# Altium PCB ESP32 Relay Card.PcbDoc
Units mm, origin at the board's own origin, x right, y up, seen from the top; angles counter-clockwise.
Board outline 89 x 129 mm, 2 copper layers (Top Layer, Bottom Layer); 109 components, 87 nets, 327 pads, 42 vias.
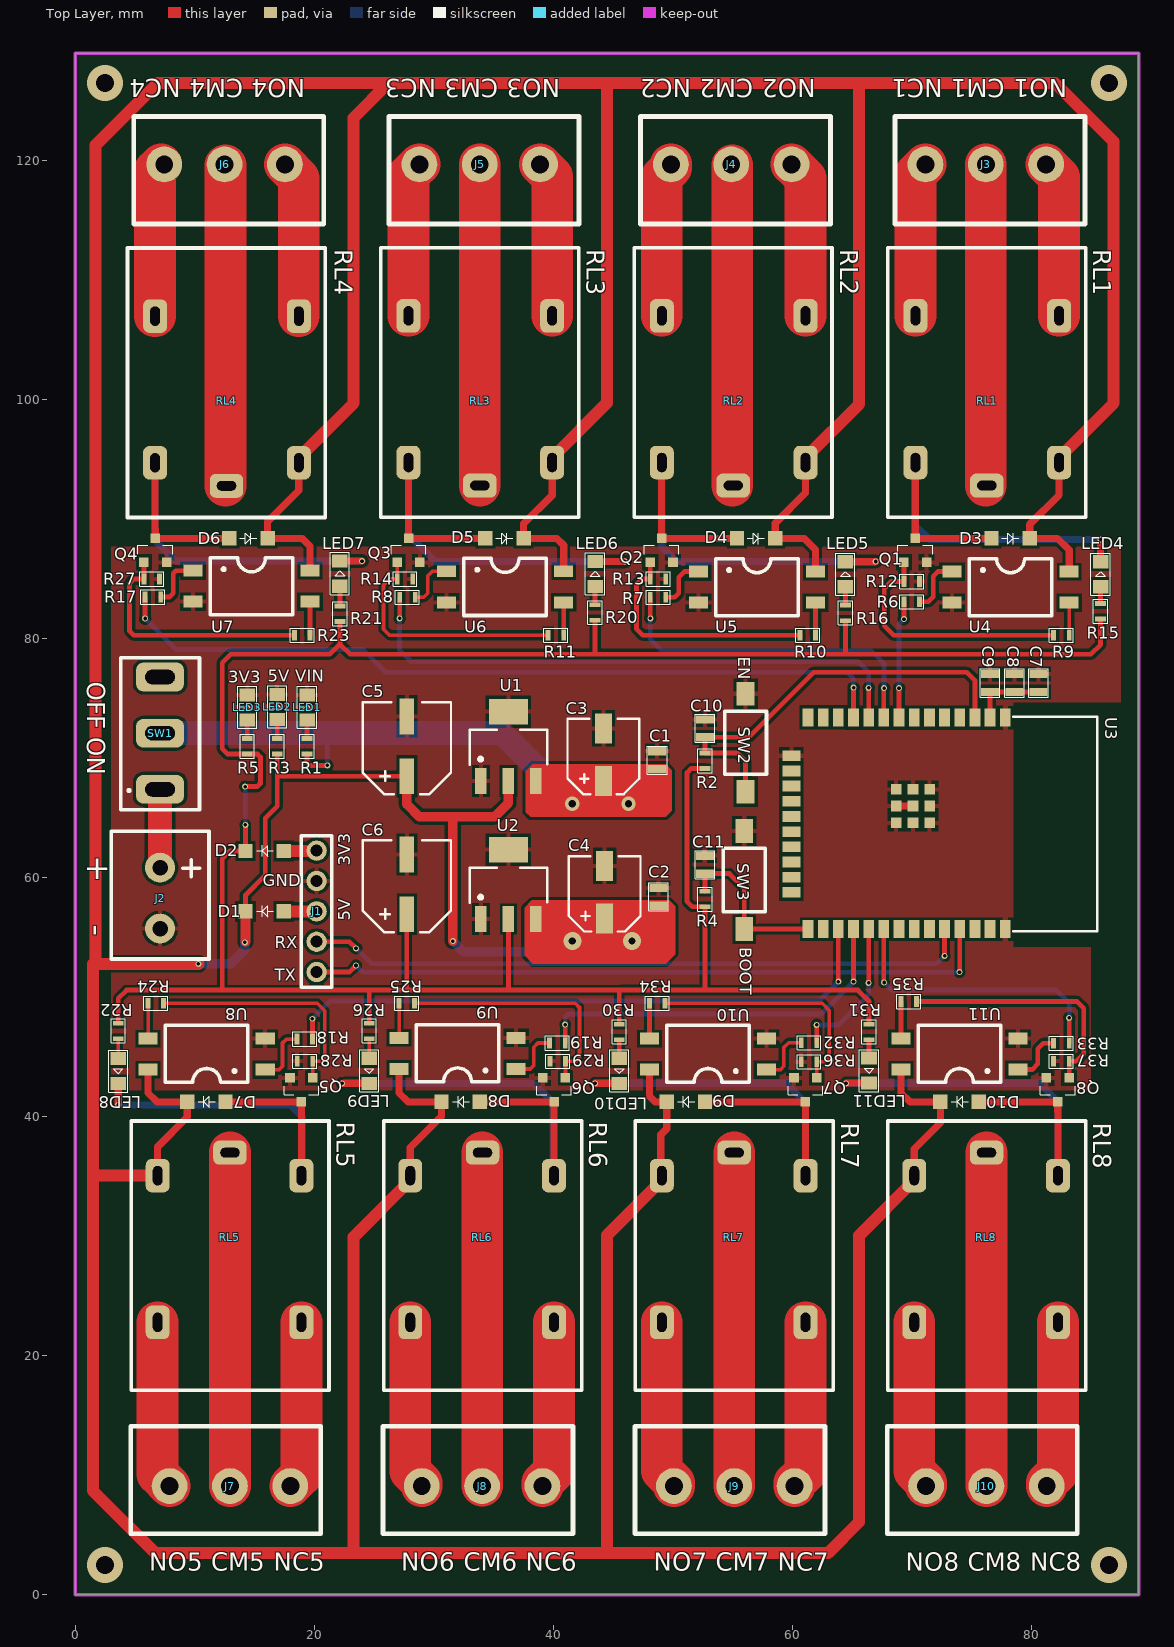
[diagram p0: Top Layer view]
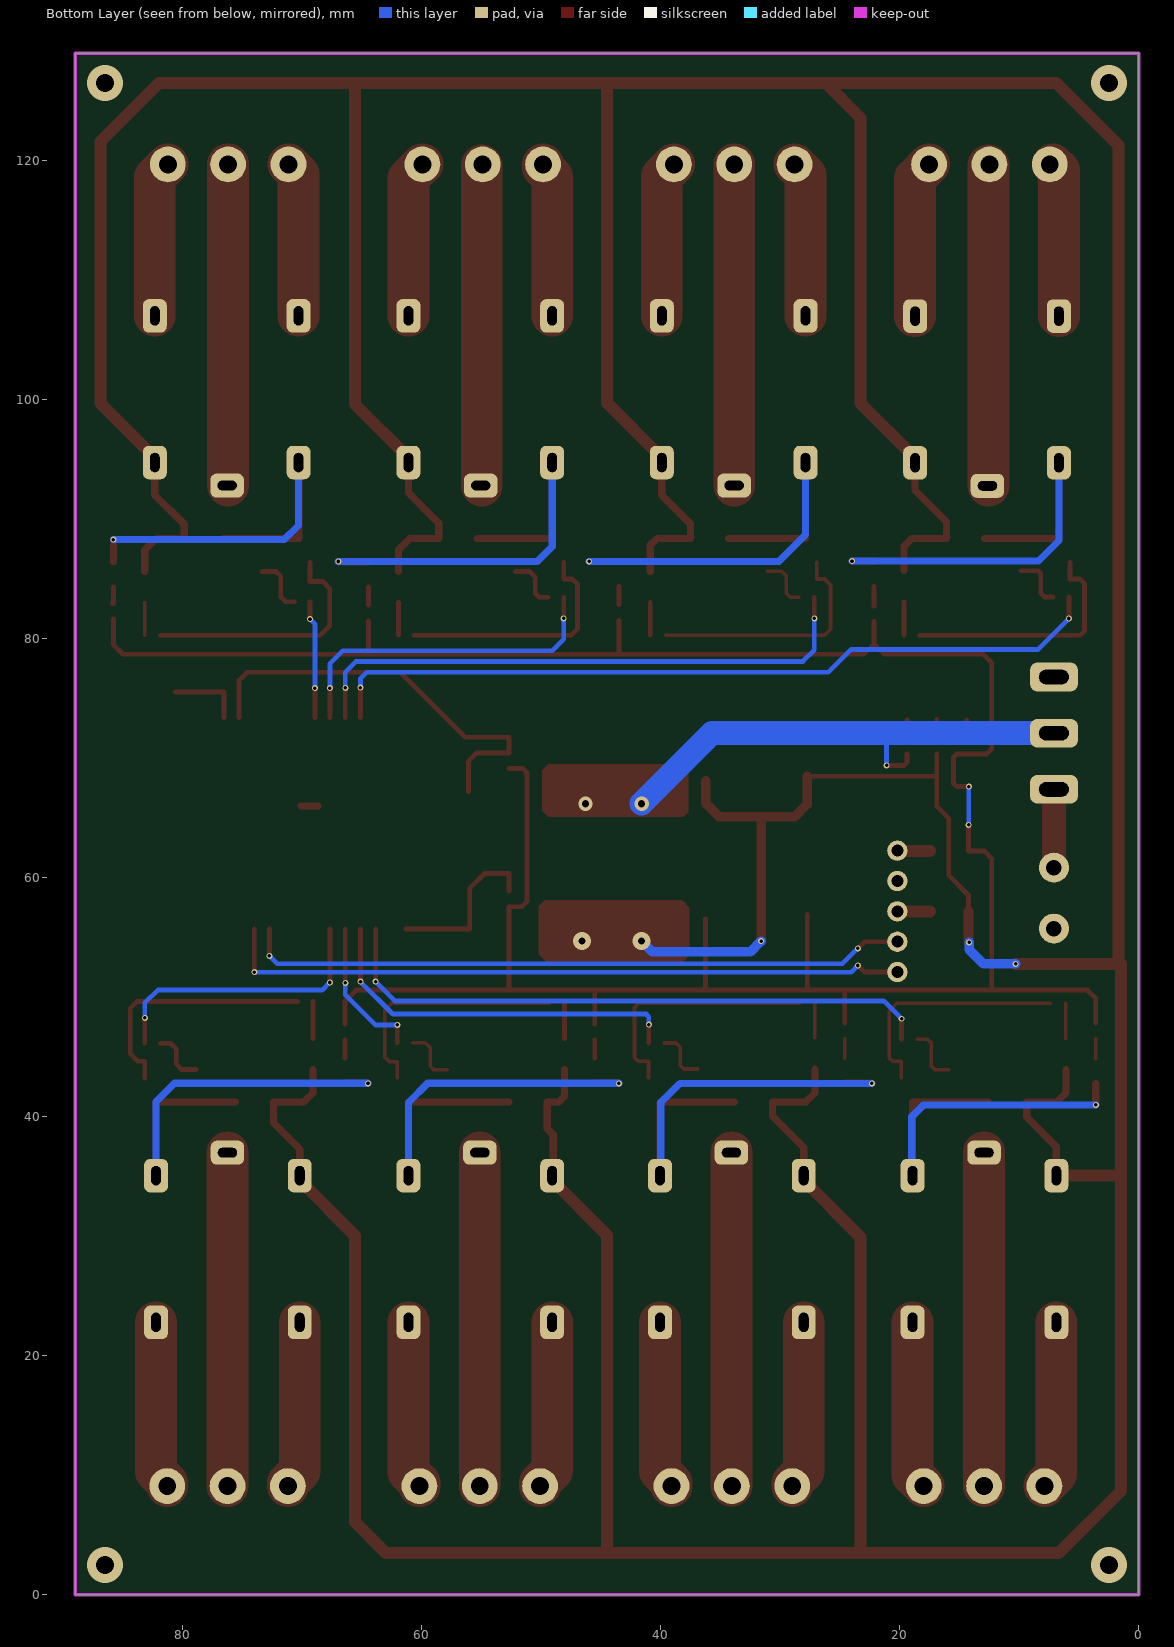
[diagram p1: Bottom Layer view, seen from below]
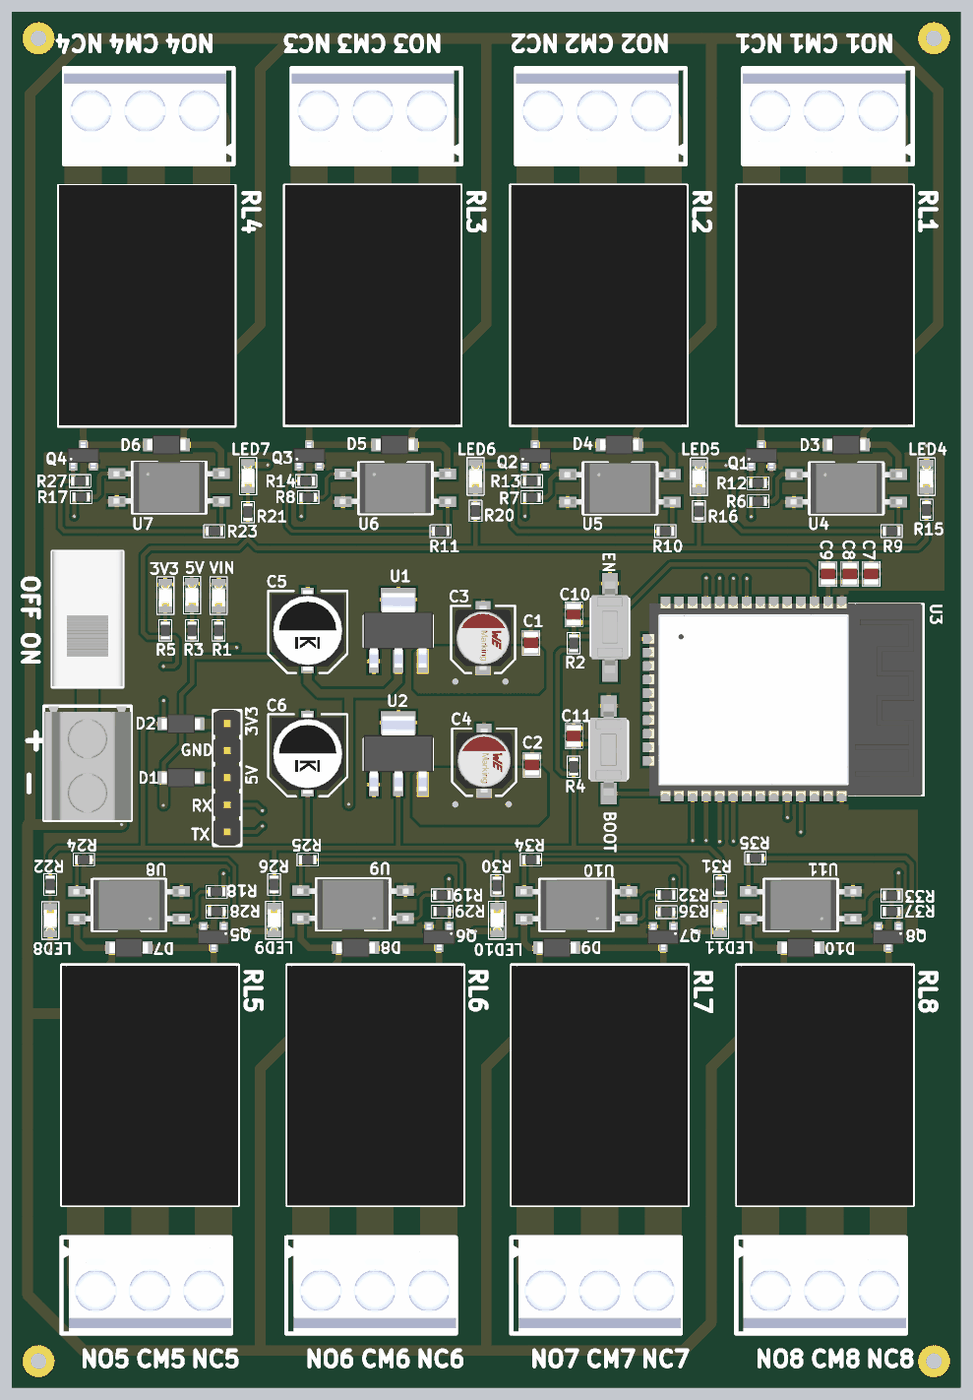
[diagram p2: 3D render of the assembled board from above, using the file's embedded part models]

## Layer stack, top to bottom
Top Solder: solder mask 0.0102, Solder Resist, Dk 3.5
Top Layer: signal copper 0.0356
Dielectric 1: dielectric 0.32, FR-4, Dk 4.8
Bottom Layer: signal copper 0.0356
Bottom Solder: solder mask 0.0102, Solder Resist, Dk 3.5

## Board outline
0,0 0,129 89,129 89,73.7 89,54.4 89,0

## Design rules (kind name [scope] priority, off if disabled: settings)
Clearance [All] p1: gap=0.254 ignorepadtopadclearanceinfootprint=TRUE except(0: Arc-Text Track-Text SMDPad-Text THPad-Text Via-Text Fill-Text Poly-Text Region-Text Text-Text Text-Hole)
ComponentClearance [All] p1: gap=0.127 collisioncheckmode=3 verticalgap=0 showdistances=FALSE
MinimumSolderMaskSliver [All] p1: minsoldermaskwidth=0.127
NetAntennae [All] p1: netantennaetolerance=0.254
PlaneClearance [All] p1: clearance=0.762
PlaneConnect [All] p1: planeconnectstyle=Relief reliefexpansion=0.381 reliefentries=4 reliefconductorwidth=0.381 reliefairgap=0.254
PolygonConnect [All] p1: connectstyle=Relief reliefconductorwidth=0.381 reliefentries=4 polygonreliefangle="90 Angle" airgapwidth=0.254
RoutingCorners [All] p1: cornerstyle=45-Degree minsetback=2.032 maxsetback=2.032
RoutingVias [All] p1: holewidth=0.3 width=0.5 viastyle="Through Hole" minholewidth=0.25 minwidth=0.4 maxholewidth=0.5 maxwidth=1
SMDEntry [All] p1: side=TRUE corner=TRUE anyangle=FALSE
SMDToCorner [All] p1: distance=150000
SMDToPlane [All] p1: distance=150000
SilkToSilkClearance [All] p1: silktosilkclearance=0
SilkToSolderMaskClearance [IsPad] p1: minsilkscreentomaskgap=0.127 clearancetoexposedcopper=TRUE
SolderMaskExpansion [All] p1: expansion=0.05 istentingtop=FALSE
UnRoutedNet [All] p1: checkbadconnections=TRUE
Width [All] p1: maxlimit=100 minlimit=0.2 preferedwidth=1 minimp=50.000000 maximp=50.000000 favimp=50.000000
21 further rules are at their usual default settings.

## Classes and differential pairs
component class "ESP32 Relay Card Relay": D3 D4 D5 D6 D7 D8 D9 D10 J3 J4 J5 J6 J7 J8 J9 J10 LED4 LED5 LED6 LED7 LED8 LED9 LED10 LED11 Q1 Q2 Q3 Q4 Q5 Q6 Q7 Q8 R6 R7 R8 R9 R10 R11 R12 R13 R14 R15 R16 R17 R18 R19 R20 R21 R22 R23 R24 R25 R26 R27 R28 R29 R30 R31 R32 R33 R34 R35 R36 R37 RL1 RL2 RL3 RL4 RL5 RL6 RL7 RL8 U4 U5 U6 U7 U8 U9 U10 U11
component class "ESP32 Relay Card Power": C1 C2 C3 C4 C5 C6 C7 C8 C9 C10 C11 D1 D2 J1 J2 LED1 LED2 LED3 R1 R2 R3 R4 R5 SW1 SW2 SW3 U1 U2 U3

## Components (designator, comment, footprint, x,y, rotation, side; value= is the part's Value field where it differs from the comment)
C1 "CC0805KRX7R9BB104" "CAP 0805" 48.7,69.85 r270 top value=0.1uF
C2 "CC0805KRX7R9BB104" "CAP 0805" 48.8,58.4 r270 top value=0.1uF
C3 "875105359001" "CAP ALUM 10UF" 44.2,70.3 r90 top value=10uF
C4 "875105359001" "CAP ALUM 10UF" 44.3,58.8 r90 top value=10uF
C5 "A766EB226M1DLAE060" "CAP ALUM 22UF" 27.75,71 r90 top value=22uF
C6 "A766EB226M1DLAE060" "CAP ALUM 22UF" 27.75,59.45 r90 top value=22uF
C7 "CC0805KKX7R9BB105" "CAP 0805" 80.611,76.3 r270 top value=1uF
C8 "CC0805KRX7R9BB104" "CAP 0805" 78.6,76.3 r270 top value=0.1uF
C9 "CC0805KKX5R8BB106" "CAP 0805" 76.556,76.3 r270 top value=10uF
C10 "CC0805KRX7R9BB104" "CAP 0805" 52.7,72.5 r270 top value=0.1uF
C11 "CC0805KRX7R9BB104" "CAP 0805" 52.7,61.1 r270 top value=0.1uF
D1 "1N5819W" SOD-123F 15.85,57.19 r180 top
D2 "1N5819W" SOD-123F 15.85,62.247 r180 top
D3 "1N5819W" SOD-123F 78.275,88.4 r0 top
D4 "1N5819W" SOD-123F 56.975,88.4 r0 top
D5 "1N5819W" SOD-123F 35.925,88.4 r0 top
D6 "1N5819W" SOD-123F 14.5,88.4 r0 top
D7 "1N5819W" SOD-123F 10.975,41.25 r180 top
D8 "1N5819W" SOD-123F 32.25,41.25 r180 top
D9 "1N5819W" SOD-123F 51.1,41.25 r180 top
D10 "1N5819W" SOD-123F 74,41.25 r180 top
J1 "61300511121" HEADER 20.2,57.19 r90 top
J2 "TB006-508-02BE" "2POS CONNECTOR" 7.1,58.3 r270 top
J3 "OSTTA034163" "3POS CONNECTOR" 76.2,119.7 r180 top
J4 "OSTTA034163" "3POS CONNECTOR" 54.9,119.7 r180 top
J5 "OSTTA034163" "3POS CONNECTOR" 33.85,119.7 r180 top
J6 "OSTTA034163" "3POS CONNECTOR" 12.5,119.7 r180 top
J7 "OSTTA034163" "3POS CONNECTOR" 12.95,9.1 r0 top
J8 "OSTTA034163" "3POS CONNECTOR" 34.05,9.1 r0 top
J9 "OSTTA034163" "3POS CONNECTOR" 55.15,9.1 r0 top
J10 "OSTTA034163" "3POS CONNECTOR" 76.25,9.1 r0 top
LED1 "150080VS75000" "LED 0805 SMD" 19.4,74.25 r90 top
LED2 "150080VS75000" "LED 0805 SMD" 16.9,74.3 r90 top
LED3 "150080VS75000" "LED 0805 SMD" 14.4,74.25 r90 top
LED4 "150080VS75000" "LED 0805 SMD" 85.8,85.4 r90 top
LED5 "150080VS75000" "LED 0805 SMD" 64.45,85.4 r90 top
LED6 "150080VS75000" "LED 0805 SMD" 43.5,85.425 r90 top
LED7 "150080VS75000" "LED 0805 SMD" 22.15,85.45 r90 top
LED8 "150080VS75000" "LED 0805 SMD" 3.6,43.825 r270 top
LED9 "150080VS75000" "LED 0805 SMD" 24.6,43.85 r270 top
LED10 "150080VS75000" "LED 0805 SMD" 45.525,43.85 r270 top
LED11 "150080VS75000" "LED 0805 SMD" 66.425,43.875 r270 top
Q1 "MMBT3904-7-F" SOT23-3 70.3,87.4 r0 top
Q2 "MMBT3904-7-F" SOT23-3 49.075,87.4 r0 top
Q3 "MMBT3904-7-F" SOT23-3 27.9,87.4 r0 top
Q4 "MMBT3904-7-F" SOT23-3 6.7,87.4 r0 top
Q5 "MMBT3904-7-F" SOT23-3 18.925,42.25 r180 top
Q6 "MMBT3904-7-F" SOT23-3 40.075,42.25 r180 top
Q7 "MMBT3904-7-F" SOT23-3 61.1,42.25 r180 top
Q8 "MMBT3904-7-F" SOT23-3 82.225,42.25 r180 top
R1 "CRGH0603F330R" "RES 0603" 19.4,71 r270 top value=330R
R2 "CRGH0603J10K" "RES 0603" 52.7,69.8 r270 top value=10K
R3 "CRGH0603J100R" "RES 0603" 16.9,71 r270 top value=100R
R4 "CRGH0603J10K" "RES 0603" 52.7,58.219 r270 top value=10K
R5 "CRGH0603J100R" "RES 0603" 14.4,71 r270 top value=100R
R6 "CRGH0603F330R" "RES 0603" 70,83.1 r0 top value=330R
R7 "CRGH0603F330R" "RES 0603" 48.775,83.475 r0 top value=330R
R8 "CRGH0603F330R" "RES 0603" 27.8,83.475 r0 top value=330R
R9 "CRGH0603J1K0" "RES 0603" 82.525,80.3 r180 top value=1K
R10 "CRGH0603J1K0" "RES 0603" 61.3,80.3 r180 top value=1K
R11 "CRGH0603J1K0" "RES 0603" 40.225,80.3 r180 top value=1K
R12 "CRGH0603J10K" "RES 0603" 70,84.8 r180 top value=10K
R13 "CRGH0603J10K" "RES 0603" 48.775,85 r180 top value=10K
R14 "CRGH0603J10K" "RES 0603" 27.6,85 r180 top value=10K
R15 "CRGH0603J100R" "RES 0603" 85.8,82.3 r270 top value=100R
R16 "CRGH0603J100R" "RES 0603" 64.45,82.165 r270 top value=100R
R17 "CRGH0603F330R" "RES 0603" 6.5,83.5 r0 top value=330R
R18 "CRGH0603F330R" "RES 0603" 19.2,46.5 r180 top value=330R
R19 "CRGH0603F330R" "RES 0603" 40.35,46.175 r180 top value=330R
R20 "CRGH0603J100R" "RES 0603" 43.5,82.2 r270 top value=100R
R21 "CRGH0603J100R" "RES 0603" 22.15,82.086 r270 top value=100R
R22 "CRGH0603J100R" "RES 0603" 3.6,47.185 r90 top value=100R
R23 "CRGH0603J1K0" "RES 0603" 19,80.3 r180 top value=1K
R24 "CRGH0603J1K0" "RES 0603" 6.75,49.5 r0 top value=1K
R25 "CRGH0603J1K0" "RES 0603" 27.75,49.5 r0 top value=1K
R26 "CRGH0603J100R" "RES 0603" 24.6,47.185 r90 top value=100R
R27 "CRGH0603J10K" "RES 0603" 6.4,85 r180 top value=10K
R28 "CRGH0603J10K" "RES 0603" 19.225,44.65 r0 top value=10K
R29 "CRGH0603J10K" "RES 0603" 40.375,44.65 r0 top value=10K
R30 "CRGH0603J100R" "RES 0603" 45.525,47.1 r90 top value=100R
R31 "CRGH0603J100R" "RES 0603" 66.425,47.1 r90 top value=100R
R32 "CRGH0603F330R" "RES 0603" 61.4,46.2 r180 top value=330R
R33 "CRGH0603F330R" "RES 0603" 82.525,46.15 r180 top value=330R
R34 "CRGH0603J1K0" "RES 0603" 48.7,49.5 r0 top value=1K
R35 "CRGH0603J1K0" "RES 0603" 69.75,49.65 r0 top value=1K
R36 "CRGH0603J10K" "RES 0603" 61.4,44.6 r0 top value=10K
R37 "CRGH0603J10K" "RES 0603" 82.525,44.65 r0 top value=10K
RL1 "G5LE-1 DC5" RELAY 76.323,99.923 r90 top
RL2 "G5LE-1 DC5" RELAY 55.1,99.923 r90 top
RL3 "G5LE-1 DC5" RELAY 33.9,99.923 r90 top
RL4 "G5LE-1 DC5" RELAY 12.7,99.9 r90 top
RL5 "G5LE-1 DC5" RELAY 12.912,29.9 r270 top
RL6 "G5LE-1 DC5" RELAY 34.05,29.9 r270 top
RL7 "G5LE-1 DC5" RELAY 55.1,29.9 r270 top
RL8 "G5LE-1 DC5" RELAY 76.224,29.9 r270 top
SW1 "500SSP1S2M2QEA" "TACTICLE SWITCH TH" 7.1,72.1 r90 top
SW2 "PTS636SM43SMTR LFS" "TACTICLE SWITCH" 56.1,71.3 r270 top
SW3 "PTS636SM43SMTR LFS" "TACTICLE SWITCH" 55.984,59.809 r270 top
U1 "AMS1117-5.0" SOT223 36.25,71 r0 top
U2 "AMS1117-3.3" SOT223 36.25,59.45 r0 top
U3 "ESP32-WROOM-32E-H4" ESP32 68.876,64.561 r270 top value=ESP32-WROOM
U4 "APC-817B1-SL" OPTOISOLATOR 78.275,84.325 r0 top
U5 "APC-817B1-SL" OPTOISOLATOR 57.05,84.325 r0 top
U6 "APC-817B1-SL" OPTOISOLATOR 35.975,84.35 r0 top
U7 "APC-817B1-SL" OPTOISOLATOR 14.75,84.4 r0 top
U8 "APC-817B1-SL" OPTOISOLATOR 11,45.25 r180 top
U9 "APC-817B1-SL" OPTOISOLATOR 32,45.3 r180 top
U10 "APC-817B1-SL" OPTOISOLATOR 52.95,45.25 r180 top
U11 "APC-817B1-SL" OPTOISOLATOR 74,45.25 r180 top

## Footprints (in the part's own frame and the unit in brackets; to place one, negate y for a bottom-side part, rotate by r counter-clockwise, add the part's x,y. Pads: shape width x height; smd on the part's side, far side on the other; paste and mask are expansions set on the pad)
"2POS CONNECTOR" [mm]
  round 2.5 hole 1.3 mask+0.05: 1(-2.55,0) 2(2.55,0)
  silkscreen extent -5.6,-4.1 5.1,4.1, body extent -5.58,-4.1 5.08,4.1, height 10
"3POS CONNECTOR" [mm]
  round 3 hole 1.5 mask+0.05: 1(-5.05,0) 2(0,0) 3(5.05,0)
  silkscreen extent -8.3,-4 7.6,5, body extent -8.32,-4 7.62,5, height 13
"CAP 0805" [mm]
  rect 0.7x1.5 smd mask+0.05: 1(-0.75,0) 2(0.75,0)
  silkscreen extent -1.17,-0.82 1.17,0.82, body extent -1,-0.67 1,0.67, height 1.22
"CAP ALUM 10UF" [mm]
  rect 2.5x1.4 smd mask+0.05: 1(-2.2,0) 2(2.2,0)
  silkscreen extent -3.3,-3 3,3, body extent -3,-2.65 3,2.65, height 5.8
"CAP ALUM 22UF" [mm]
  rect 3x1.2 smd mask+0.05: 1(-2.5,0) 2(2.5,0)
  silkscreen extent -4,-3.7 3.7,3.7, body extent -3.75,-3.4 3.75,3.4, height 6
ESP32 [mm]
  rect 1.5x0.9 smd mask+0.05: 1(-8.834,8.951) 2(-8.834,7.681) 3(-8.834,6.411) 4(-8.834,5.141) 5(-8.834,3.871) 6(-8.834,2.601) 7(-8.834,1.331) 8(-8.834,0.061) 9(-8.834,-1.209) 10(-8.834,-2.479) 11(-8.834,-3.749) 12(-8.859,-5.019) 13(-8.859,-6.289) 14(-8.859,-7.559) 25(8.859,-7.559) 26(8.859,-6.289) 27(8.859,-5.019) 28(8.859,-3.749) 29(8.859,-2.479) 30(8.859,-1.209) 31(8.859,0.061) 32(8.859,1.331) 33(8.859,2.601) 34(8.859,3.871) 35(8.859,5.141) 36(8.859,6.411) 37(8.859,7.681) 38(8.859,8.951)
  rect 0.9x1.5 smd mask+0.05: 15(-5.649,-8.951) 16(-4.379,-8.951) 17(-3.109,-8.951) 18(-1.839,-8.951) 19(-0.569,-8.951) 20(0.701,-8.951) 21(1.971,-8.951) 22(3.241,-8.951) 23(4.511,-8.951) 24(5.781,-8.951)
  rect 0.9x0.9 smd mask+0.05: ""(-2.839,1.224) ""(-2.839,2.624) ""(-2.839,-0.176) ""(-1.439,2.624) ""(-1.439,1.224) ""(-1.439,-0.176) ""(-0.039,2.624) ""(-0.039,1.224) ""(-0.039,-0.176)
  silkscreen extent -8.93,9.62 9.05,16.65, body extent -8.94,-9.06 9.06,16.44, height 3.25
HEADER [mm]
  round 1.7 hole 1 mask+0.05: 1(-5.08,0) 2(-2.54,0) 3(0,0) 4(2.54,0) 5(5.08,0)
  silkscreen extent -6.35,-1.28 6.32,1.28, body extent -6.35,-1.27 6.35,1.27, height 8.47
"LED 0805 SMD" [mm]
  rect 1.1x1.3 smd mask+0.05: 1(-1.05,0) 2(1.05,0)
  silkscreen extent -1.75,-0.8 1.78,0.8, body extent -1,-0.63 1,0.63, height 0.7
OPTOISOLATOR [mm]
  rect 1.6x1 smd mask+0.05: 1(-4.9,1.3) 2(-4.9,-1.3) 3(4.9,-1.3) 4(4.9,1.3)
  silkscreen extent -3.45,-2.4 3.45,2.37, body extent -5.22,-2.39 5.22,2.39, height 3.81
RELAY [mm]
  rrect50% 2x2.8 hole 0.8 slot 1.6 at 90 deg mask+0.05: 1(-7.1,0.038)
  rrect50% 2.8x2 hole 0.8 slot 1.6 at 0 deg mask+0.05: 2(-5.175,-6.013) 3(7.1,-6.013) 4(7.1,6.013) 5(-5.175,6.013)
  silkscreen extent -9.75,-8.23 12.8,8.32, body extent -9.67,-8.21 12.83,8.29, height 19
"RES 0603" [mm]
  rect 0.4x0.9 smd mask+0.05: 1(-0.65,0) 2(0.65,0)
  silkscreen extent -1,-0.6 1,0.6, body extent -0.8,-0.4 0.8,0.4, height 0.55
SOD-123F [mm]
  rect 1.2x1.2 smd mask+0.05: 1(-1.6,0) 2(1.6,0)
  silkscreen extent -0.72,-0.48 0.67,0.45, body extent -1.8,-0.9 1.8,0.9, height 1.1
SOT23-3 [mm]
  rect 0.8x0.8 smd mask+0.05: 1(-0.95,-1) 2(0.95,-1) 3(0,1)
  silkscreen extent -1.45,-0.33 1.45,0.43, body extent -1.5,-1.21 1.5,1.21, height 1.12
SOT223 [mm]
  rect 0.95x2.15 smd mask+0.102: 1(-2.3,-2.9) 2(0,-2.9) 3(2.3,-2.9)
  rect 3.25x2.15 smd mask+0.102: 1(0,2.9)
  silkscreen extent -3.25,-1.55 3.25,1.38, body extent -3.25,-3.5 3.25,3.5, height 1.8
"TACTICLE SWITCH" [mm]
  rect 2x1.5 smd mask+0.05: 1(-4.1,0) 2(4.1,0)
  silkscreen extent -2.65,-1.75 2.65,1.75, body extent -4.3,-1.75 4.3,1.75, height 4.3
"TACTICLE SWITCH TH" [mm]
  rrect50% 2.4x4 hole 1.2 slot 2.5 at 90 deg mask+0.05: 1(-4.7,0) 2(0,0) 3(4.7,0)
  silkscreen extent -6.4,-3.3 6.3,3.3, body extent -6.35,-3.3 6.35,3.3, height 13.59

## Part data
C1 C2 C8 C10 C11: library part "CAP CER 0.1UF 0805 SMD", "CAP CER 0.1UF 50V X7R 0805"
C3 C4: library part "CAP ALUM 10UF SMD", "CAP ALUM 10UF 20% 16V SMD"
C5 C6: library part "CAP ALUM 22UF SMD", "CAP ALUM 22UF 20% 20V SMD"
C7: library part "CAP CER 1UF 0805 SMD", "CAP CER 1UF 50V X7R 0805"
C9: library part "CAP CER 10UF 0805 SMD", "CAP CER 10UF 25V X5R 0805"
D1 D2 D3 D4 D5 D6 D7 D8 D9 D10: library part "SCHOTTKY DIODE SMD", "DIODE SCHOTTKY 40V 1A SOD-123F"
J1: library part "HEADER 5POS TH", "CONN HEADER 5POS 2.54MM"
J2: library part "2POS CONNECTOR", "TERM BLK 2P 5.08 PCB"
J3 J4 J5 J6 J7 J8 J9 J10: library part "3POS CONNECTOR", "TERM BLK 3P 5.08MM PCB"
LED1 LED2 LED3 LED4 LED5 LED6 LED7 LED8 LED9 LED10 LED11: library part "GREEN LED 0805 SMD", "LED GREEN 0805 SMD"
Q1 Q2 Q3 Q4 Q5 Q6 Q7 Q8: library part "NPN TRANSISTOR SMD", "TRANS NPN 40V 0.2A SOT23-3"
R1 R6 R7 R8 R17 R18 R19 R32 R33: library part "RES 330 OHM 0603 SMD", "RES 330 OHM 1% 1/5W 0603"
R2 R4 R12 R13 R14 R27 R28 R29 R36 R37: library part "RES 10K OHM 0603 SMD", "RES 10K OHM 5% 1/5W 0603"
R3 R5 R15 R16 R20 R21 R22 R26 R30 R31: library part "RES 100 OHM 0603 SMD", "RES 100 OHM 5% 1/5W 0603"
R9 R10 R11 R23 R24 R25 R34 R35: library part "RES 1K OHM 0603 SMD", "RES 1K OHM 5% 1/5W 0603"
RL1 RL2 RL3 RL4 RL5 RL6 RL7 RL8: library part "RELAY TH", "RELAY 5VDC COIL 10A"
SW1: library part "SLIDE SWITCH TH", "SWITCH SLIDE 5A 120V"
SW2 SW3: library part "TACTILE SWITCH SMD", "SWITCH TACTILE 0.05A 12V"
U1: library part "LDO REG 5V 1A SMD", "IC LDO REG 5V 1A SOT223"
U2: library part "LDO REG 3V3 1A SMD", "IC LDO REG 3.3V 1A SOT223"
U3: library part ESP32-WROOM-32E, "RF TXRX MOD BT WIFI TH SMD"
U4 U5 U6 U7 U8 U9 U10 U11: library part "OPTOCOUPLER SMD", "OPTOISOLATOR 5KV 1CH SMD"

## Via types
v1: diameter 0.5, hole 0.3, Top Layer to Bottom Layer, tented both sides, 34 vias
v2: diameter 3, hole 1.5, Top Layer to Bottom Layer, 4 vias
v3: diameter 1.5, hole 0.6, Top Layer to Bottom Layer, tented both sides, 2 vias
v4: diameter 1.2, hole 0.6, Top Layer to Bottom Layer, tented both sides, 2 vias

## Nets (pads, with @x,y where several pads share a name; then routed paths per layer and width w, separated by ;. In a path a pad name is that pad's centre, name@x,y a point inside that pad or via, vN(x,y) a via of type N, cw(c..) or ccw(c..) an arc to the next point about the centre after c; other vN are vias at no path point)
3V3: C6.1 D2.2 R2.2 R4.2 R5.2 R15.2 R16.2 R20.2 R21.2 R22.2 R26.2 R30.2 R31.2 U2.2 | length 224
  Top Layer w0.4: R22.2 3.6,49.9 4.3,50.6 12.2,50.6 ; v1(14.224,67.632) 15.232,67.632 15.5,67.9 15.5,70.1 15.25,70.35 12.75,70.35 12.3,70.8 12.3,78 13,78.7 21.3,78.7 22.15,79.55 ; v1@14.25,64.41 D2.2 12.947,62.247 12.3,61.6 12.3,50.7 12.2,50.6 ; R21.2 22.15,79.55 ; R26.2 24.6,50.6 ; C6.1 27.75,50.6 ; U2.2 36.25,50.65 36.2,50.6 ; R20.2 43.5,78.7 ; R30.2 45.525,50.525 45.6,50.6 ; R2.2 51.55,69.15 51.2,68.8 51.2,58 51.631,57.569 R4.2 52.7,56.988 52.7,50.6 ; R16.2 64.45,78.75 64.5,78.7 ; R31.2 66.425,49.675 65.5,50.6 52.7,50.6 ; R15.2 85.8,79.5 85,78.7 64.5,78.7 ; 12.2,50.6 24.6,50.6 ; 22.15,79.55 23,78.7 43.5,78.7 ; 24.6,50.6 27.75,50.6 ; 27.75,50.6 36.2,50.6 ; 36.2,50.6 45.6,50.6 ; 43.5,78.7 64.5,78.7 ; 45.6,50.6 52.7,50.6
  Bottom Layer w0.4: v1(14.224,67.632) 14.237,67.618 v1(14.237,64.423)
5V: C2.2 C4.1 C5.1 D1.2 D3.2 D4.2 D5.2 D6.2 D7.2 D8.2 D9.2 D10.2 R3.2 RL1.2 RL2.2 RL3.2 RL4.2 RL5.2 RL6.2 RL7.2 RL8.2 U1.2 U2.3 U4.4 U5.4 U6.4 U7.4 U8.4 U9.4 U10.4 U11.4 | length 680.9
  Top Layer w0.4: D1.2 14.25,58.55 15.9,60.2 15.9,65 16.9,66 16.9,68.5 ; R3.2 16.9,68.5 ; C5.1 16.9,68.5
  Top Layer w0.6: U8.4 6.1,42 6.85,41.25 D7.2 9.375,39.975 6.9,37.5 RL5.2 ; RL4.2 18.713,92.413 16.1,89.8 D6.2 19,88.4 19.65,87.75 U7.4 ; U9.4 27.1,42 27.85,41.25 D8.2 30.65,40.05 28.038,37.437 RL6.2 ; RL3.2 39.913,92.013 37.525,89.625 D5.2 40.3,88.4 40.875,87.825 U6.4 ; U10.4 48.05,41.719 48.519,41.25 D9.2 49.5,39 49,38.5 49,35.162 RL7.2 ; RL2.2 61.112,92.213 58.575,89.675 D4.2 61,88.4 61.95,87.45 U5.4 ; U11.4 69.1,42 69.85,41.25 D10.2 72.4,39.5 70.211,37.311 RL8.2 ; RL1.2 82.336,92.036 79.875,89.575 D3.2 82.2,88.4 83.175,87.425 U4.4
  Top Layer w0.8: v1@14.25,54.65 D1.2 ; C5.1 27.75,66.15 28.8,65.1 31.6,65.1 ; v1(31.6,54.7) 31.6,65.1 ; U1.2 36.25,66.25 35.1,65.1 31.6,65.1
  Top Layer w1: 1.7,52.8 1.7,121.3 6.906,126.506 26.206,126.506 ; RL5.2 1.48,35.075 ; v1(10.3,52.8) 1.48,52.8 1.48,35.075 ; RL4.2 18.713,95.125 23.3,99.712 23.3,123.6 26.206,126.506 ; RL6.2 28.038,34.675 23.3,29.937 23.3,3.5 ; RL3.2 39.913,95.148 44.5,99.735 44.5,126.4 44.394,126.506 ; RL7.2 49.087,34.675 44.5,30.087 44.5,3.5 ; RL2.2 61.112,95.148 65.6,99.636 65.6,126.3 65.806,126.506 ; RL8.2 70.211,34.675 65.6,30.064 65.6,6.1 63,3.5 44.5,3.5 ; RL1.2 82.336,95.148 86.9,99.712 86.9,121.6 82,126.5 68.3,126.5 68.294,126.506 65.806,126.506 ; 1.48,35.075 1.48,8.72 6.7,3.5 23.3,3.5 ; 23.3,3.5 44.5,3.5 ; 26.206,126.506 44.394,126.506 ; 44.394,126.506 65.806,126.506
  Bottom Layer w0.8: v1(10.3,52.8) 13,52.8 14.2,54 v1(14.2,54.6) ; v1(31.6,54.7) 32.5,53.8 40.7,53.8 v3(41.6,54.7)
  other v3: 46.6,54.7
COM1: J3.2 RL1.1 | length 27
  Top Layer w2: RL1.1@76.2,92.823 RL1.1
  Top Layer w3.5: RL1.1@76.2,92.823 J3.2
COM2: J4.2 RL2.1 | length 27
  Top Layer w2: J4.2 J4.2@54.981,119.619 ; RL2.1@54.981,92.823 RL2.1
  Top Layer w3.5: RL2.1@54.981,92.823 J4.2@54.981,119.619
COM3: J5.2 RL3.1 | length 26.9
  Top Layer w2: J5.2 J5.2@33.856,119.694 ; RL3.1@33.856,92.823 RL3.1
  Top Layer w3.5: RL3.1@33.856,92.823 J5.2@33.856,119.694
COM4: J6.2 RL4.1 | length 27
  Top Layer w2: J6.2 J6.2@12.581,119.619 ; RL4.1@12.581,92.8 RL4.1
  Top Layer w3.5: RL4.1@12.581,92.8 J6.2@12.581,119.619
COM5: J7.2 RL5.1 | length 27.9
  Top Layer w3.5: J7.2 RL5.1
COM6: J8.2 RL6.1 | length 27.9
  Top Layer w2: J8.2 J8.2@34.069,9.119 ; RL6.1@34.069,37 RL6.1
  Top Layer w3.5: J8.2@34.069,9.119 RL6.1@34.069,37
COM7: J9.2 RL7.1 | length 27.9
  Top Layer w2: RL7.1 RL7.1@55.144,37 ; J9.2@55.144,9.106 J9.2
  Top Layer w3.5: J9.2@55.144,9.106 RL7.1@55.144,37
COM8: J10.2 RL8.1 | length 27.9
  Top Layer w2: J10.2 J10.2@76.261,9.111
  Top Layer w3.5: J10.2@76.261,9.111 RL8.1
EN: C10.2 R2.1 SW2.2 U3.3 | length 35.8
  Top Layer w0.4: SW2.2 56.1,69.75 55.4,70.45 R2.1 C10.2 56.35,71.75 61.8,77.2 74.6,77.2 75.287,76.513 U3.3
GND: C1.1 C2.1 C3.2 C4.2 C5.2 C6.2 C7.1 C8.1 C9.1 C10.1 C11.1 J1.4 J2.2 LED1.2 LED2.2 LED3.2 Q1.2 Q2.2 Q3.2 Q4.2 Q5.2 Q6.2 Q7.2 Q8.2 R12.1 R13.1 R14.1 R27.1 R28.1 R29.1 R36.1 R37.1 SW2.1 SW3.1 U1.1 U2.1 U3. U3.1 U3.15 U3.38 U4.2 U5.2 U6.2 U7.2 U8.2 U9.2 U10.2 U11.2 | length 1.4
  Top Layer w0.6: U3.@68.7,66 U3.@70.1,66
IO0: C11.2 R4.1 SW3.2 U3.25 | length 14
  Top Layer w0.4: R4.1 52.7,59.619 C11.2 54.75,60.35 55.984,59.116 SW3.2 57.115,55.709 57.122,55.702 U3.25
L1: D3.1 LED4.2 Q1.3 RL1.5 | length 35.8
  Top Layer w0.6: RL1.5 70.3,94.737 Q1.3 D3.1 ; LED4.2 v1(85.8,88.3)
  Bottom Layer w0.6: RL1.5 70.31,89.49 71.5,88.3 v1(85.8,88.3)
L2: D4.1 LED5.2 Q2.3 RL2.5 | length 40.6
  Top Layer w0.6: RL2.5 49.075,94.736 Q2.3 D4.1 ; LED5.2 66.97,86.45 v1(66.983,86.462)
  Bottom Layer w0.6: RL2.5 49.087,87.713 50.338,86.462 v1(66.983,86.462)
L3: D5.1 LED6.2 Q3.3 RL3.5 | length 40.3
  Top Layer w0.6: RL3.5 27.887,89.194 27.9,89.181 Q3.3 D5.1 ; LED6.2 v1(45.997,86.474) v1(45.997,86.474)
  Bottom Layer w0.6: RL3.5 27.887,88.713 30.126,86.474 v1(45.997,86.474)
L4: D6.1 LED7.2 Q4.3 RL4.5 | length 38.9
  Top Layer w0.6: RL4.5 6.687,89.194 6.7,89.181 Q4.3 D6.1 ; LED7.2 v1(24,86.5)
  Bottom Layer w0.6: RL4.5 6.687,88.213 8.4,86.5 v1(24,86.5)
L5: D7.1 LED8.2 Q5.3 RL5.5 | length 35.1
  Top Layer w0.6: v1@3.6,41 3.6,41.844 LED8.2 ; D7.1 13.556,41.25 Q5.3 18.925,40.469 RL5.5
  Bottom Layer w0.6: v1(3.6,41) 18,41 19,40 19,35.15 RL5.5
L6: D8.1 LED9.2 Q6.3 RL6.5 | length 39.2
  Top Layer w0.6: v1(22.331,42.797) 22.505,42.797 22.509,42.8 LED9.2 ; D8.1 39.294,41.25 Q6.3 40.075,35.087 RL6.5
  Bottom Layer w0.6: v1(22.331,42.797) 38.403,42.797 40,41.2 40,35.138 RL6.5
L7: D9.1 LED10.2 Q7.3 RL7.5 | length 41
  Top Layer w0.6: v1(43.5,42.8) LED10.2 ; D9.1 Q7.3 61.1,40.469 61.113,40.456 RL7.5
  Bottom Layer w0.6: v1(43.5,42.8) 59.5,42.8 61.1,41.2 61.1,35.088 RL7.5
L8: D10.1 LED11.2 Q8.3 RL8.5 | length 39.3
  Top Layer w0.6: v1(64.5,42.8) 64.525,42.825 LED11.2 ; D10.1 Q8.3 82.225,40.469 82.237,40.457 RL8.5
  Bottom Layer w0.6: v1(64.5,42.8) 80.7,42.8 82.237,41.263 RL8.5
NC1: J3.3 RL1.4 | length 13
  Top Layer w3.5: RL1.4 70.311,118.861 J3.3
NC2: J4.3 RL2.4 | length 13
  Top Layer w3.5: RL2.4 49.087,118.667 49.85,119.429 J4.3
NC3: J5.3 RL3.4 | length 13.1
  Top Layer w3.5: RL3.4 27.888,118.787 J5.3
NC4: J6.3 RL4.4 | length 12.9
  Top Layer w3.5: RL4.4 6.688,119.188 J6.3@7.2,119.7
NC5: J7.3 RL5.4 | length 14.1
  Top Layer w3.5: J7.3 18.925,10.025 RL5.4
NC6: J8.3 RL6.4 | length 14.1
  Top Layer w3.5: J8.3 39.1,9.371 40.063,10.333 RL6.4
NC7: J9.3 RL7.4 | length 14.1
  Top Layer w3.5: J9.3 60.2,9.371 61.112,10.283 RL7.4
NC8: J10.3 RL8.4 | length 14.1
  Top Layer w3.5: J10.3 81.3,9.371 82.236,10.307 RL8.4
NetC7_2: C7.2 C8.2 C9.2 U3.2 | length 6.2
  Top Layer w0.4: U3.2 76.557,74.817 76.556,74.819 C9.2 C8.2 C7.2
NetD1_1: D1.1 J1.3 | length 2.8
  Top Layer w1: D1.1 J1.3
NetD2_1: D2.1 J1.5 | length 2.8
  Top Layer w1: D2.1 20.177,62.247 J1.5
NetLED1_1: LED1.1 R1.1 | length 1.5
  Top Layer w0.4: R1.1 LED1.1
NetLED2_1: LED2.1 R3.1 | length 1.6
  Top Layer w0.4: R3.1 LED2.1
NetLED3_1: LED3.1 R5.1 | length 1.5
  Top Layer w0.4: R5.1 LED3.1
NetLED4_1: LED4.1 R15.1 | length 1.5
  Top Layer w0.3: R15.1 R15.1@85.95,82.95
  Top Layer w0.4: R15.1 LED4.1
NetLED5_1: LED5.1 R16.1 | length 1.5
  Top Layer w0.4: R16.1 64.45,83.396 LED5.1
NetLED6_1: LED6.1 R20.1 | length 1.5
  Top Layer w0.4: R20.1 LED6.1
NetLED7_1: LED7.1 R21.1 | length 1.7
  Top Layer w0.4: R21.1 22.15,83.317 LED7.1
NetLED8_1: LED8.1 R22.1 | length 1.7
  Top Layer w0.3: LED8.1 R22.1
NetLED9_1: LED9.1 R26.1 | length 1.6
  Top Layer w0.3: LED9.1 24.6,45.954 R26.1
NetLED10_1: LED10.1 R30.1 | length 1.6
  Top Layer w0.4: LED10.1 R30.1
NetLED11_1: LED11.1 R31.1 | length 1.5
  Top Layer w0.4: LED11.1 R31.1
NetQ1_1: Q1.1 R9.2 R12.2 | length 21.1
  Top Layer w0.4: Q1.1 R12.2 68.3,84.8 67.7,84.2 67.7,81.1 68.5,80.3 R9.2
NetQ2_1: Q2.1 R10.2 R13.2 | length 20.4
  Top Layer w0.4: Q2.1 R13.2 47.4,85 46.966,84.566 46.966,80.834 47.5,80.3 R10.2
NetQ3_1: Q3.1 R11.2 R14.2 | length 20.4
  Top Layer w0.3: Q3.1 R14.2 26.3,85 25.8,84.5 25.8,80.8 26.3,80.3 R11.2
NetQ4_1: Q4.1 R23.2 R27.2 | length 20.7
  Top Layer w0.4: Q4.1 R27.2 4.9,85 4.554,84.654 4.554,80.646 4.9,80.3 R23.2
NetQ5_1: Q5.1 R24.2 R28.2 | length 20.2
  Top Layer w0.3: R24.2 20.25,49.5 20.875,48.875 20.875,44.925 20.6,44.65 R28.2 Q5.1
NetQ6_1: Q6.1 R25.2 R29.2 | length 20.8
  Top Layer w0.3: R25.2 41.85,49.5 42.2,49.15 42.2,44.95 41.9,44.65 R29.2 Q6.1
NetQ7_1: Q7.1 R34.2 R36.2 | length 20.5
  Top Layer w0.3: R34.2 62.5,49.5 63.1,48.9 63.1,45 62.7,44.6 R36.2 Q7.1
NetQ8_1: Q8.1 R35.2 R37.2 | length 20.9
  Top Layer w0.4: R35.2 83.825,49.65 84.4,49.075 84.4,45.294 83.756,44.65 R37.2 Q8.1
NetR6_1: R6.1 U3.8 | length 9.9
  Top Layer w0.4: U3.8 v1(68.937,75.867) ; v1(69.35,81.65) R6.1
  Bottom Layer w0.4: v1(68.937,75.867) 68.937,81.237 v1(69.35,81.65)
NetR6_2: R6.2 U4.1 | length 4.8
  Top Layer w0.4: R6.2 71.4,83.1 71.8,83.5 71.8,85.231 72.194,85.625 U4.1
NetR7_1: R7.1 U3.9 | length 28.4
  Top Layer w0.4: v1(48.125,81.707) R7.1 ; U3.9 67.667,75.857 v1(67.684,75.873)
  Bottom Layer w0.4: v1(48.125,81.707) 48.125,79.975 49.1,79 66.6,79 67.684,77.916 v1(67.684,75.873)
NetR7_2: R7.2 U5.1 | length 4.4
  Top Layer w0.4: R7.2 50.175,83.475 50.5,83.8 50.5,85.156 50.969,85.625 U5.1
NetR8_1: R8.1 U3.10 | length 48.2
  Top Layer w0.4: v1(27.149,81.7) 27.15,81.701 R8.1 ; U3.10 66.397,74.526 66.4,74.528 v1(66.4,75.9)
  Bottom Layer w0.4: v1(27.149,81.7) 27.149,79.051 28.1,78.1 65.5,78.1 66.4,77.2 v1(66.4,75.9)
NetR8_2: R8.2 U6.1 | length 4.4
  Top Layer w0.3: R8.2 29.175,83.475 29.5,83.8 29.5,85.256 29.894,85.65 U6.1
NetR9_1: R9.1 U4.3 | length 2.8
  Top Layer w0.3: R9.1 83.175,82.144 U4.3 U4.3@83.2,83
NetR10_1: R10.1 U5.3 | length 2.7
  Top Layer w0.4: R10.1 61.95,82.144 U5.3
NetR11_1: R11.1 U6.3 | length 2.8
  Top Layer w0.4: R11.1 40.875,81.131 U6.3
NetR17_1: R17.1 U3.11 | length 66.5
  Top Layer w0.4: v1(5.847,81.693) 5.85,81.697 R17.1 ; U3.11 65.127,75.905 v1(65.134,75.911)
  Bottom Layer w0.4: v1(5.847,81.693) 8.44,79.1 24.1,79.1 26,77.2 64.6,77.2 65.114,76.686 65.114,75.93 v1(65.134,75.911)
NetR17_2: R17.2 U7.1 | length 4.6
  Top Layer w0.4: R17.2 7.9,83.5 8.2,83.8 8.2,85.466 8.434,85.7 U7.1
NetR18_1: R18.1 U3.27 | length 51.4
  Top Layer w0.4: R18.1 v1(19.849,48.203) ; v1(63.857,51.304) U3.27
  Bottom Layer w0.4: v1(19.849,48.203) 21.346,49.7 62.253,49.7 v1(63.857,51.304)
NetR18_2: R18.2 U8.1 | length 4.9
  Top Layer w0.3: U8.1 17.081,43.95 17.35,44.219 17.35,46.175 17.675,46.5 R18.2
NetR19_1: R19.1 U3.28 | length 31.9
  Top Layer w0.4: R19.1 41,47.717 v1(41.002,47.719) ; v1(65.127,51.304) U3.28
  Bottom Layer w0.4: v1(41.002,47.719) 41.002,48.366 41.236,48.6 62.423,48.6 v1(65.127,51.304)
NetR19_2: R19.2 U9.1 | length 4.6
  Top Layer w0.3: U9.1 38.081,44 38.375,44.294 38.375,45.825 38.725,46.175 R19.2
NetR23_1: R23.1 U7.3 | length 2.8
  Top Layer w0.4: R23.1 19.65,81.131 U7.3
NetR24_1: R24.1 U8.3 | length 2.9
  Top Layer w0.3: U8.3 R24.1
NetR25_1: R25.1 U9.3 | length 2.9
  Top Layer w0.3: U9.3 R25.1
NetR32_1: R32.1 U3.29 | length 12.4
  Top Layer w0.4: v1(62.046,47.692) 62.05,47.688 R32.1 ; U3.29 66.397,54.571 66.4,54.569 v1(66.4,51.2)
  Bottom Layer w0.4: v1(62.046,47.692) 63.892,47.692 66.4,50.2 v1(66.4,51.2)
NetR32_2: R32.2 U10.1 | length 4.8
  Top Layer w0.3: U10.1 59.031,43.95 59.3,44.219 59.3,45.8 59.7,46.2 R32.2
NetR33_1: R33.1 U3.30 | length 24
  Top Layer w0.4: U3.30 67.667,51.257 v1(67.685,51.24) ; R33.1 v1(83.175,48.275)
  Bottom Layer w0.4: v1(67.685,51.24) 68.324,50.6 82.1,50.6 83.175,49.525 v1(83.175,48.275)
NetR33_2: R33.2 U11.1 | length 4.6
  Top Layer w0.4: U11.1 80.081,43.95 80.55,44.419 80.55,45.675 81.025,46.15 R33.2
NetR34_1: R34.1 U10.3 | length 2.9
  Top Layer w0.4: U10.3 R34.1
NetR35_1: R35.1 U11.3 | length 3.1
  Top Layer w0.4: U11.3 69.1,48.819 R35.1
NO1: J3.1 RL1.3 | length 13.1
  Top Layer w3.5: J3.1 82.336,118.614 RL1.3
NO2: J4.1 RL2.3 | length 13.2
  Top Layer w3.5: J4.1 61.112,118.537 RL2.3
NO3: J5.1 RL3.3 | length 13.1
  Top Layer w3.5: J5.1 39.913,118.687 RL3.3
NO4: J6.1 RL4.3 | length 13.2
  Top Layer w3.5: J6.1 18.713,118.537 RL4.3
NO5: J7.1 RL5.3 | length 14.1
  Top Layer w3.5: RL5.3 6.9,10.1 J7.1
NO6: J8.1 RL6.3 | length 14.1
  Top Layer w3.5: RL6.3 28.038,10.333 29,9.371 J8.1
NO7: J9.1 RL7.3 | length 14.1
  Top Layer w3.5: RL7.3 49.087,10.383 50.1,9.371 J9.1
NO8: J10.1 RL8.3 | length 14.1
  Top Layer w3.5: RL8.3 70.211,10.36 71.2,9.371 J10.1
RXD0: J1.2 U3.34 | length 55.8
  Top Layer w0.4: J1.2 22.95,54.65 v1(23.5,54.1) ; U3.34 72.747,53.468 v1(72.752,53.463)
  Bottom Layer w0.4: v1(23.5,54.1) 24.8,52.8 72.089,52.8 v1(72.752,53.463)
TXD0: J1.1 U3.35 | length 57.9
  Top Layer w0.4: J1.1 22.95,52.11 v1(23.5,52.66) ; v1(74,52.1) 74.017,52.117 U3.35
  Bottom Layer w0.4: v1(23.5,52.66) 24.06,52.1 v1(74,52.1)
VCC: J2.1 SW1.1 | length 6.5
  Top Layer w2: J2.1 SW1.1
VIN: C1.2 C3.1 R1.2 SW1.2 U1.3 | length 42.2
  Top Layer w0.4: R1.2 19.4,69.634 19.634,69.4 v1(21.1,69.4)
  Bottom Layer w0.4: v1(21.1,69.4) 21.1,72.1
  Bottom Layer w2: SW1.2 21.1,72.1 35.7,72.1 v4(41.6,66.2)
  other v4: 46.3,66.2
pads on no net: SW1.3 U3.4 U3.5 U3.6 U3.7 U3.12 U3.13 U3.14 U3.16 U3.17 U3.18 U3.19 U3.20 U3.21 U3.22 U3.23 U3.24 U3.26 U3.31 U3.32 U3.33 U3.36 U3.37
copper on no net:
  other v2: 2.5,2.5 86.5,2.5 2.5,126.5 86.5,126.5

## Polygon pours and split planes (outlines as drawn)
GND on Top Layer "GND_L01_P001" (solid, pour order 1): 85,42.2 85,54.2 78.5,54.2 78.5,74.7 87.5,74.7 87.5,87.7 3,87.7 3,42.2

## Keep-outs
Keep-Out Layer:
  lines w0.3: 0,0 0,129 89,129 89,73.7 89,55.2 89,54.4 89,0 0,0

## Other copper
Top Layer:
  region net 5V: 37.6,57.5 38.2,58.1 38.4,58.1 49.7,58.1 50.2,57.6 50.2,53.6 49.4,52.8 38.3,52.8 37.6,53.5
  region net VIN: 37.7,68.9 38.3,69.5 49.4,69.5 49.9,69 49.9,65.6 49.4,65.1 38.1,65.1 37.7,65.5

## Silkscreen, mask and mechanical layers (free items; w line width, h text height)
Top Overlay:
  text "NC4" at 8.85,126.8 h1.5 r180
  text "CM4" at 14.05,126.8 h1.5 r180
  text "NO4" at 19.25,126.8 h1.5 r180
  text "NC3" at 30.2,126.8 h1.5 r180
  text "CM3" at 35.4,126.8 h1.5 r180
  text "NO3" at 40.6,126.8 h1.5 r180
  text "NC2" at 51.55,126.8 h1.5 r180
  text "CM2" at 56.75,126.8 h1.5 r180
  text "NO2" at 61.95,126.8 h1.5 r180
  text "NC1" at 72.6,126.8 h1.5 r180
  text "CM1" at 77.8,126.8 h1.5 r180
  text "NO1" at 83,126.8 h1.5 r180
  text "RL4" at 21.7,112.6 h1.5 r270
  text "RL3" at 42.8,112.6 h1.5 r270
  text "RL2" at 64,112.6 h1.5 r270
  text "RL1" at 85.2,112.6 h1.5 r270
  text "EN" at 55.5,78.5 h1 r270
  text "OFF ON" at 1,76.4 h1.5 r270
  text "5V" at 16.1,76.4 h1
  text "VIN" at 18.4,76.4 h1
  text "3V3" at 12.8,76.3 h1
  text "3V3" at 23,61 h1 r90
  text "+" at 0.7,59.867 h2
  text "GND" at 15.7,59.3 h1
  text "5V" at 23,56.4 h1 r90
  text "-" at 2.4,55.1 h2 r90
  text "BOOT" at 55.6,54.2 h1 r270
  text "RX" at 16.7,54.1 h1
  text "TX" at 16.7,51.4 h1
  text "RL5" at 21.9,39.6 h1.5 r270
  text "RL6" at 43,39.6 h1.5 r270
  text "RL7" at 64.1,39.5 h1.5 r270
  text "RL8" at 85.2,39.5 h1.5 r270
  text "NO5" at 6.2,2 h1.5
  text "CM5" at 11.4,2 h1.5
  text "NC5" at 16.6,2 h1.5
  text "NO6" at 27.3,2 h1.5
  text "CM6" at 32.5,2 h1.5
  text "NC6" at 37.7,2 h1.5
  text "NO7" at 48.4,2 h1.5
  text "CM7" at 53.6,2 h1.5
  text "NC7" at 58.8,2 h1.5
  text "NO8" at 69.5,2 h1.5
  text "CM8" at 74.7,2 h1.5
  text "NC8" at 79.9,2 h1.5
Route Tool Path:
  lines w0.8: 9.813,95.1 9.813,91.15 10.863,90.1 14.338,90.1 15.5,91.262 15.5,94.013 15.5,94.4 15.5,95.1 ; 10.112,34.7 10.112,35.4 10.112,35.787 10.112,38.537 11.275,39.7 14.75,39.7 15.8,38.65 15.8,34.7 ; 31.012,95.123 31.012,91.173 32.062,90.123 35.538,90.123 36.7,91.285 36.7,94.036 36.7,94.423 36.7,95.123 ; 31.25,34.7 31.25,35.4 31.25,35.787 31.25,38.537 32.413,39.7 35.888,39.7 36.938,38.65 36.938,34.7 ; 52.212,95.123 52.212,91.173 53.262,90.123 56.737,90.123 57.9,91.285 57.9,94.036 57.9,94.423 57.9,95.123 ; 52.3,34.7 52.3,35.4 52.3,35.787 52.3,38.537 53.462,39.7 56.938,39.7 57.988,38.65 57.988,34.7 ; 73.424,34.7 73.424,35.4 73.424,35.787 73.424,38.537 74.586,39.7 78.061,39.7 79.111,38.65 79.111,34.7 ; 73.436,95.123 73.436,91.173 74.486,90.123 77.961,90.123 79.123,91.285 79.123,94.036 79.123,94.423 79.123,95.123